# Altium PCB Controller.PcbDoc
Units mil, origin at the board's own origin, x right, y up, seen from the top; angles counter-clockwise.
Board outline 6000 x 4000 mil, 2 copper layers (Top Layer, Bottom Layer); 24 components, 18 nets, 90 pads, 0 vias.
Unrouted connection lines stored in the file: 57.
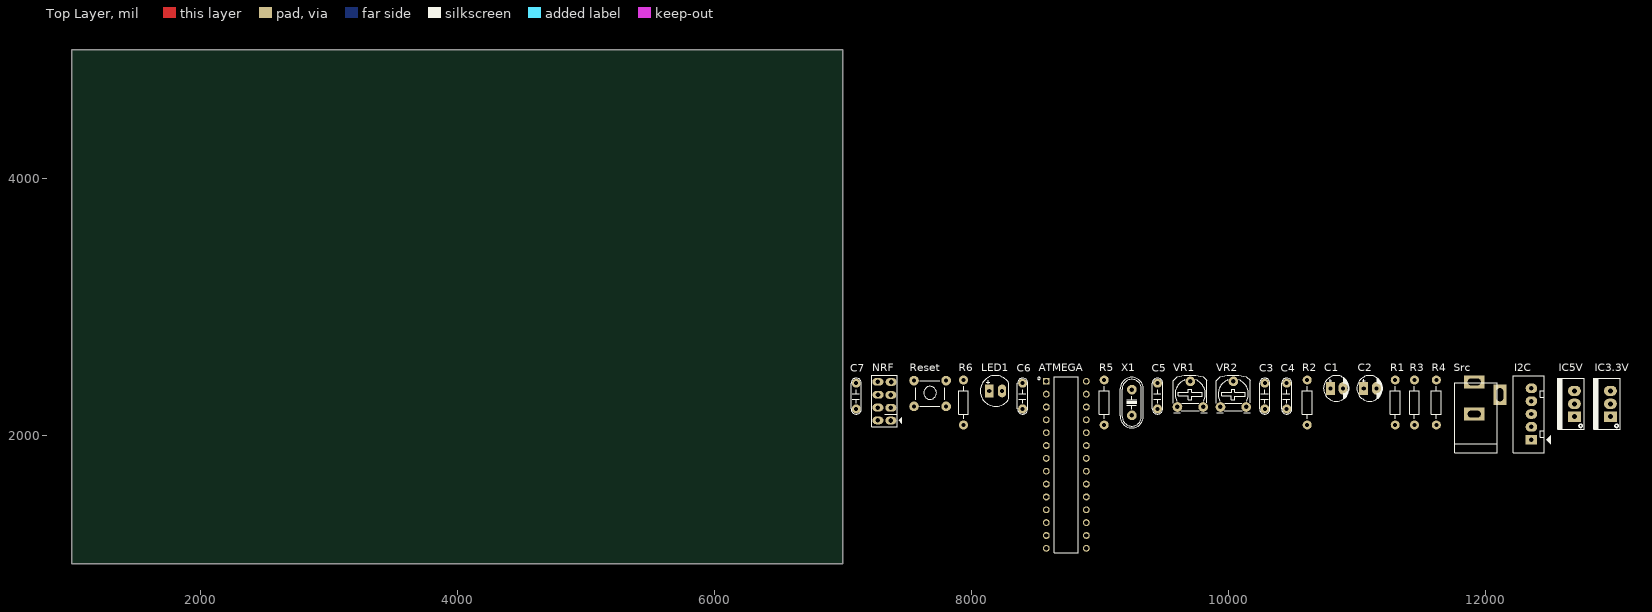
[diagram p0: Top Layer view]
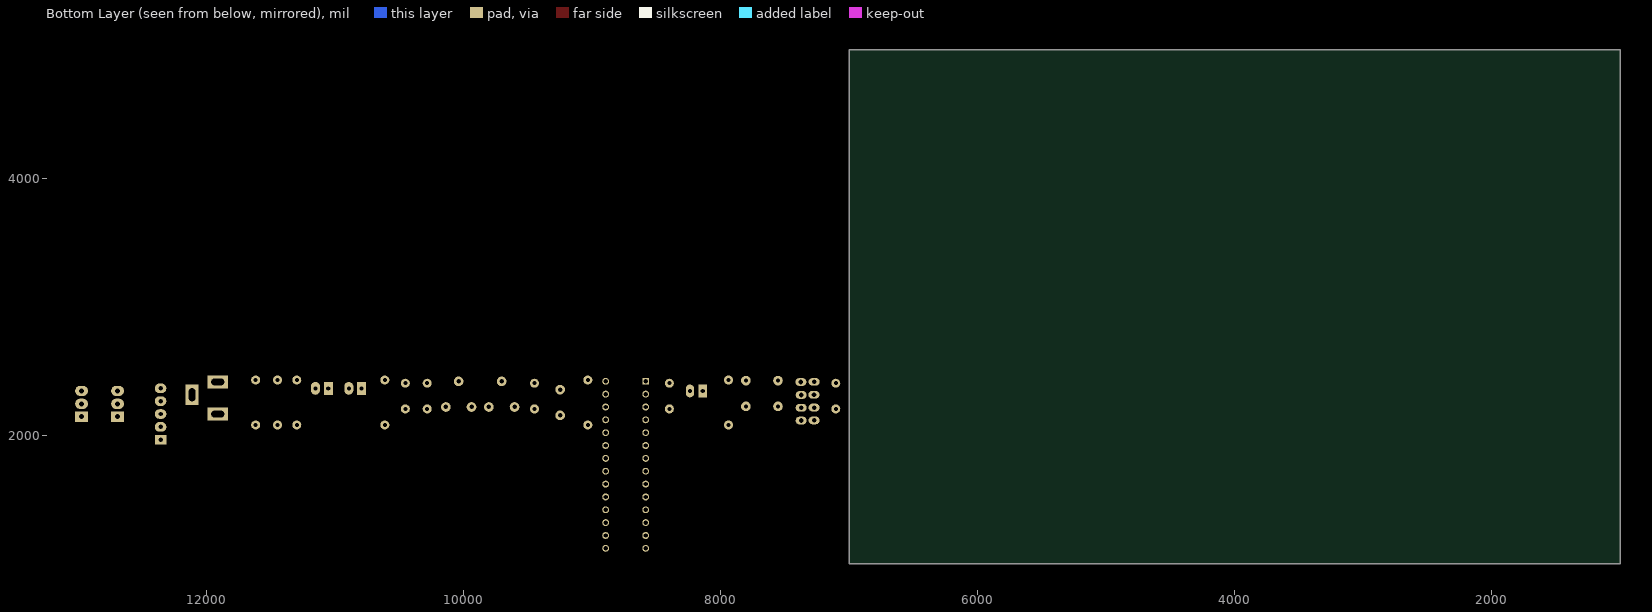
[diagram p1: Bottom Layer view, seen from below]

## Layer stack, top to bottom
Top Solder: solder mask 0.4, Solder Resist, Dk 3.5
Top Layer: signal copper 1.4
Dielectric 1: dielectric 12.6, FR-4, Dk 4.8
Bottom Layer: signal copper 1.4
Bottom Solder: solder mask 0.4, Solder Resist, Dk 3.5

## Board outline
1000,1000 7000,1000 7000,5000 1000,5000

## Design rules (kind name [scope] priority, off if disabled: settings)
Clearance [All] p1: gap=10 ignorepadtopadclearanceinfootprint=FALSE except(0: Arc-Hole Track-Hole SMDPad-Hole THPad-Hole Via-Hole Fill-Hole Poly-Hole Region-Hole Text-Hole)
PolygonConnect [All] p1: connectstyle=Relief reliefconductorwidth=10 reliefentries=4 polygonreliefangle="90 Angle" airgapwidth=10
RoomDefinition Controller [InComponentClass('Controller')] p1: confinementstyle=ConfineIn formatcopy=TRUE lockcomponents=FALSE outline 7045,1065 13190,1065 13190,2575 7045,2575
RoutingVias [All] p1: holewidth=28 width=50 viastyle="Through Hole" minholewidth=28 minwidth=50 maxholewidth=28 maxwidth=50
SolderMaskExpansion [All] p1: expansion=4 istentingtop=FALSE
Width [All] p1: maxlimit=10 minlimit=10 preferedwidth=10
30 further rules are at their usual default settings.

## Components (designator, comment, footprint, x,y, rotation, side; value= is the part's Value field where it differs from the comment)
ATMEGA "ATMEGA328P-PU" DIP794W46P254L2967H457Q28B 8740,1770 r0 top
C1 "10uF" CP1/2 10795,2365 r0 top value=10uF/50V
C2 "10uF" CP1/2 11055,2365 r0 top value=10uF/50V
C3 "104" CN2 10285,2205 r90 top value=0.1uF
C4 "104" CN2 10455,2205 r90 top value=0.1uF
C5 "104" CN2 9450,2205 r90 top value=0.1uF
C6 "104" CN2 8400,2205 r90 top value=0.1uF
C7 "104" CN2 7105,2205 r90 top value=0.1uF
I2C "JP5" CON5 12360,1965 r90 top value="Connector 5"
IC3.3V "LM317" QTO-220 12975,2145 r90 top
IC5V "LM317" QTO-220 12695,2145 r90 top
LED1 "LED" LED-5-Green 8140,2345 r0 top value="LED 3 ly Single Colour"
NRF "Connector 4x2" JP4x2 7325,2265 r90 top
R1 "Res1" R1/4W 11300,2080 r90 top value=220
R2 "Res1" R1/4W 10615,2080 r90 top value=220
R3 "Res1" R1/4W 11450,2080 r90 top value=220
R4 "Res1" R1/4W 11620,2080 r90 top value=220
R5 "Res1" R1/4W 9035,2080 r90 top value=220
R6 "Res1" R1/4W 7940,2080 r90 top value=1K
Reset "SW" SW4 7555,2425 r0 top value="Button chip 4 pin"
Src "Jac DC" DC-IN 12015,2290 r90 top
VR1 "10K" VR 9605,2220 r0 top value="VR 10K"
VR2 "10K" VR 9940,2220 r0 top value="VR 10K"
X1 "16Mhz" XT2 9250,2255 r90 top value=4Mhz

## Footprints (in the part's own frame and the unit in brackets; to place one, negate y for a bottom-side part, rotate by r counter-clockwise, add the part's x,y. Pads: shape width x height; smd on the part's side, far side on the other; paste and mask are expansions set on the pad)
CN2 [mil]
  round 70 hole 31: 1(0,0) 2(200,0)
  silkscreen extent -40,-40 240,40, body extent -54,-44 260,55, height 407
CON5 [mil] "CON5"
  rect 75x90 hole 34: 1(0,0)
  oval 75x90 hole 34: 2(100,0) 3(200,0) 4(300,0) 5(400,0)
  silkscreen extent -100,-150 500,140
CP1/2 [mil] "Tu hoa < 22uF/16>50V"
  rect 70x100 hole 32: 1(0,0)
  oval 70x100 hole 32: 2(100,0)
  silkscreen extent -53,-100 147,100, body extent -49,-99 149,99, height 287
DC-IN [mil] "Jac DC input"
  rect 100x160 hole 50 slot 100 at 90 deg: 1(125,100) 2(-125,100)
  rect 160x100 hole 50 slot 100 at 0 deg: 3(25,-100)
  silkscreen extent -425,-80 120,250, body extent -410,-105 134,269, height 434
DIP794W46P254L2967H457Q28B [mm]
  rect 1.358x1.358 hole 0.85: 1(-3.96,16.51)
  round 1.358 hole 0.85: 2(-3.96,13.97) 3(-3.96,11.43) 4(-3.96,8.89) 5(-3.96,6.35) 6(-3.96,3.81) 7(-3.96,1.27) 8(-3.96,-1.27) 9(-3.96,-3.81) 10(-3.96,-6.35) 11(-3.96,-8.89) 12(-3.96,-11.43) 13(-3.96,-13.97) 14(-3.96,-16.51) 15(3.96,-16.51) 16(3.96,-13.97) 17(3.96,-11.43) 18(3.96,-8.89) 19(3.96,-6.35) 20(3.96,-3.81) 21(3.96,-1.27) 22(3.96,1.27) 23(3.96,3.81) 24(3.96,6.35) 25(3.96,8.89) 26(3.96,11.43) 27(3.96,13.97) 28(3.96,16.51)
  silkscreen extent -5.65,-17.4 2.38,17.4
JP4x2 [mil] "Connector 4x2"
  oval 60x86 hole 36: 1(-150.5,-49.5) 2(-50.5,-49.5) 3(48.5,-49.5) 4(149.5,-51.5) 5(-149.5,51.5) 6(-49.5,51.5) 7(50,50) 8(150.5,51.5)
  silkscreen extent -200,-135 200,101, body extent -197,-100 203,100, height 335
LED-5-Green [mil] "LED 2 PIN, 5 ly , Only colour,pin to pin 100mil"
  rect 65x100 hole 32: 1(0,0)
  oval 65x100 hole 32: 2(100,0)
  silkscreen extent -70,-120 154,120, body extent -69,-120 145,117, height 339
QTO-220 [mil] "TO-220 - 1-2-3"
  rect 80x100 hole 39: 1(0,0)
  oval 80x100 hole 39: 2(100,0) 3(200,0)
  silkscreen extent -100,-76 300,130, body extent -119,-64 322,121, height 755
R1/4W [mil] "R 1/4W, 2 Pin, 350mil"
  round 70 hole 31: 1(0,0) 2(350,0)
  silkscreen extent 48,-38 302,38, body extent -40,-47 386,47, height 111
SW4 [mil] "SW button 4pin, 250 x250 mil"
  round 75 hole 31: 1(0,0) 2(250,-200) 3(250,0) 4(0,-200)
  silkscreen extent 15,-215 240,0, body extent -36,-220 276,24, height 276
VR [mil] "Resistor Variable"
  round 75 hole 35: 1(0,0) 2(100,200) 3(200,0)
  silkscreen extent -31,-44 231,246, body extent -27,-48 229,230, height 295
XT2 [mil] "Footpin for Crystal 2 pin"
  round 75 hole 34: 1(-100,0) 2(100,0)
  silkscreen extent -198,-90 195,90, body extent -233,-93 213,90, height 138

## Part data
ATMEGA: "AVR AVRÂ® ATmega Microcontroller IC 8-Bit 20MHz 32KB _16K x 16_ FLASH 28-PDIP", Package="PDIP-28 Atmel", Availability=Unavailable, MF=Microchip, MP=ATMEGA328P-PU, Price=None, SnapEDA_Link=https://www.snapeda.com/parts/ATMEGA328P-PU/Microchip/view-part/44282/?ref=snap
C1 C2: library part CP1, "Cap P  0,1uF < 22uF , 16 - 50V", Description 1="10 => 220uF/6,3V/10V - 10uF => 100uF/16V", Description 2="0,1uF => 33uF/50V - 10uF => 22uF/63V", Description 3="0,47uF => 10uF/100V"
C3 C4 C5 C6 C7: library part CN2, "Cap np 104 => 105pF"
I2C: library part Con5, "Connector 5"
IC3.3V IC5V: "Adj Voltage +1.2 -> +37V"
LED1: "LED Single colour Green and Red"
NRF: library part JP4x2
R1 R2 R3 R4 R5 R6: library part Res1_1, "Resistor", Manufacturer="Generic Components", Class=Passive, Published=08/06/2000, Publisher="Altium Hobart Technology Centre", SubClass=Resistor
Reset: library part SW4, "Switch button 4 pin"
Src: library part DCIN, "Jac DC input"
VR1 VR2: library part VR, "Var Resistor"
X1: library part XT2, "Crystal For all Crystal 2pin."

## Nets (pads, with @x,y where several pads share a name; then routed paths per layer and width w, separated by ;. In a path a pad name is that pad's centre, name@x,y a point inside that pad or via, vN(x,y) a via of type N, cw(c..) or ccw(c..) an arc to the next point about the centre after c; other vN are vias at no path point)
+3.3: C2.1 IC3.3V.2 NRF.4 R4.1
+5: ATMEGA.7 ATMEGA.20 ATMEGA.21 C1.1 C4.2 I2C.1 IC3.3V.3 IC5V.2 R1.1 R2.1 R3.1 R6.2
CE: ATMEGA.13 NRF.7
CFL: ATMEGA.4 I2C.2
CSN: ATMEGA.14 NRF.3
GND: ATMEGA.22 C1.2 C2.2 C3.1 C4.1 C5.1 C6.1 C7.2 I2C.5 LED1.2 NRF.8 Reset.2 Reset.4 Src.2 VR1.2 VR1.3 VR2.2 VR2.3
MISO: ATMEGA.18 NRF.5
MOSI: ATMEGA.17 NRF.2
NetIC3.3V_1: IC3.3V.1 R4.2 VR2.1
NetIC5V_1: IC5V.1 R3.2 VR1.1
NetLED1_1: LED1.1 R5.2
RESET: ATMEGA.1 C7.1 R6.1 Reset.1 Reset.3
SCK: ATMEGA.19 NRF.6 R5.1
SCL: ATMEGA.28 I2C.3 R1.2
SDA: ATMEGA.27 I2C.4 R2.2
VCC: C3.2 IC5V.3 Src.1
XTAL1: ATMEGA.9 C5.2 X1.2
XTAL2: ATMEGA.10 C6.2 X1.1
pads on no net: ATMEGA.2 ATMEGA.3 ATMEGA.5 ATMEGA.6 ATMEGA.8 ATMEGA.11 ATMEGA.12 ATMEGA.15 ATMEGA.16 ATMEGA.23 ATMEGA.24 ATMEGA.25 ATMEGA.26 NRF.1 Src.3